# EAGLE board VarredorA (EAGLE 3.55)
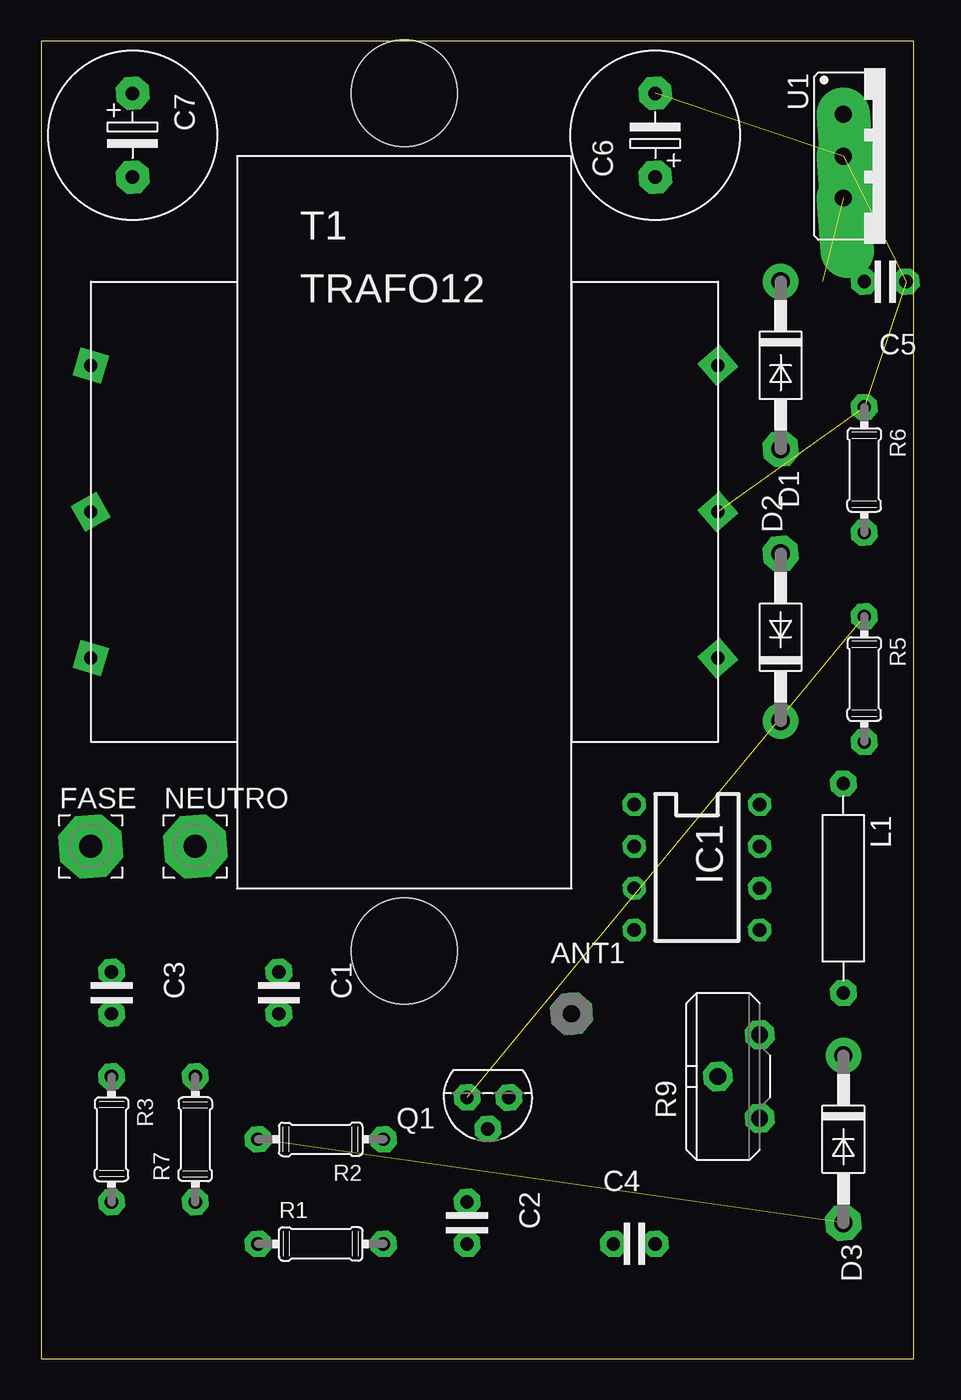
[diagram p0: board, top side]
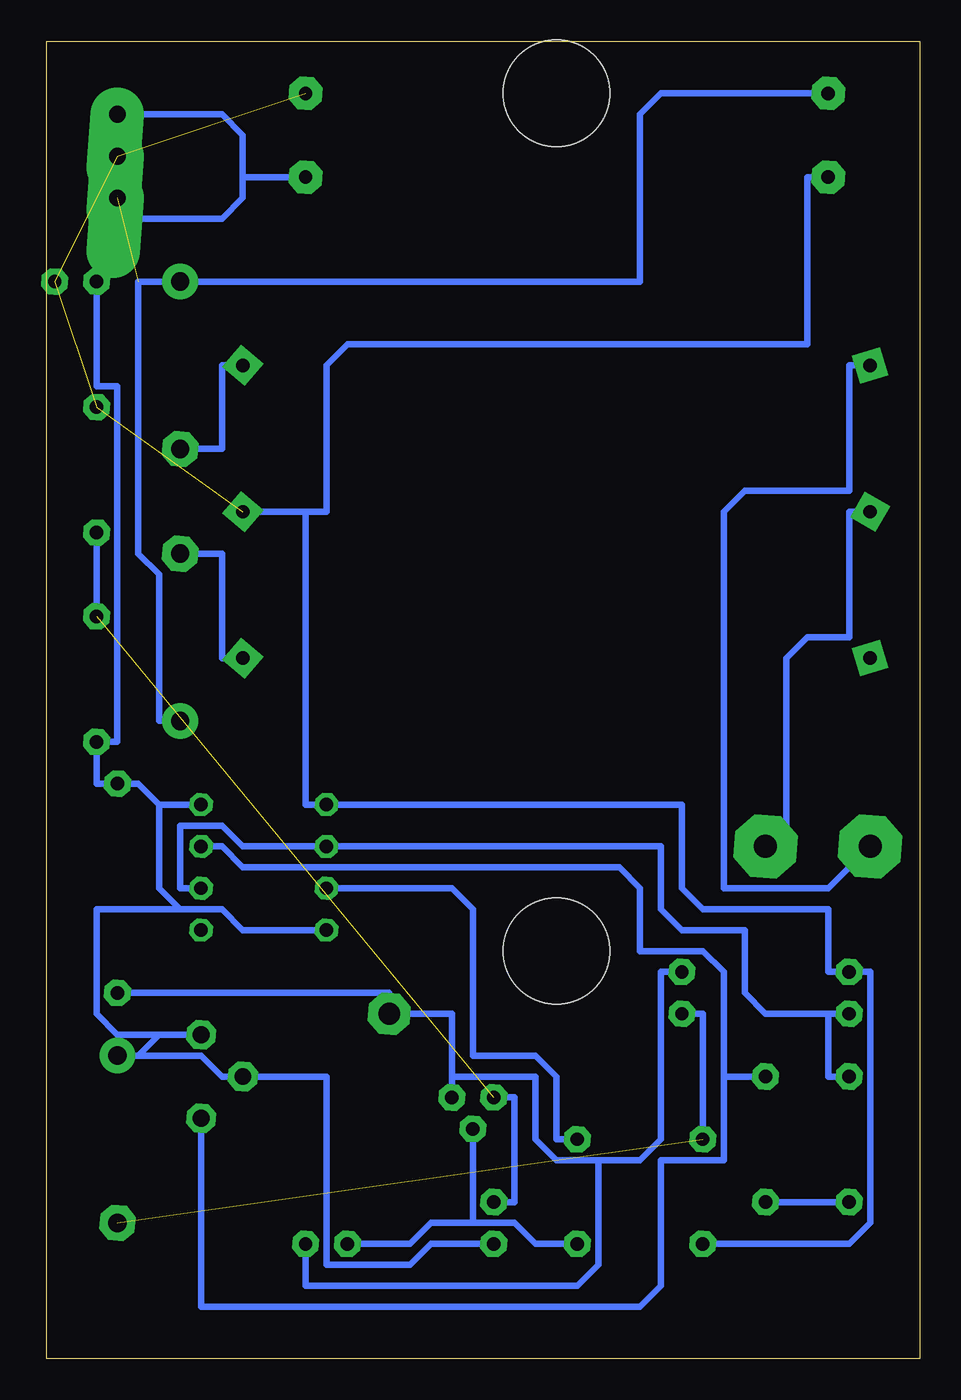
[diagram p1: board, bottom side, seen from below]

Size 53.01 x 80 mm. Coordinates in mm from the lower left corner, seen from the top.
Outline: 0,0 53.01,0 53.01,80 0,80 0,0
Copper layers used: Bottom

## Footprints (pad centres in the part's own frame; a part is rotated, then mirrored left to right if it is on the bottom)
D-01 = drill 1.321 pad 2.54 octagon:  0,0
2,5 = drill 0.813 pad 1.6 octagon:  -1.27,0;  1.27,0
-5 = drill 0.813 pad 2.007 octagon:  -2.54,0;  2.54,0
41-10 = drill 1.118 pad 2.159 octagon:  5.08,0 | drill 1.118 pad 2.159 round:  -5.08,0
81/1,4 = drill 1.397 pad 3.81 octagon:  0,0
L8 = drill 0.813 pad 1.397 octagon:  -3.81,-3.81;  -1.27,-3.81;  1.27,-3.81;  3.81,-3.81;  3.81,3.81;  1.27,3.81;  -1.27,3.81;  -3.81,3.81
12,5 = drill 0.813 pad 1.6 octagon:  -6.35,0;  6.35,0
92 = drill 0.813 pad 1.6 octagon:  1.27,0;  0,1.905;  -1.27,0
04/7 = drill 0.813 pad 1.6 octagon:  -3.81,0;  3.81,0
-10S = drill 1.016 pad 1.778 octagon:  -2.54,-1.27;  2.54,-1.27;  0,1.27
AFO500 = drill 0.813 pad 1.778 square: 10 -19.05,8.89; 20 -19.05,-8.89; C-1 19.05,8.89; C-2 19.05,-8.89; RA -19.05,0;  19.05,0 | hole 6.452: 0,25.4; 0,-26.67
220S = drill 1.016 pad 3.251 offset:  -2.54,-2.54;  0,-2.54;  2.54,-2.54

## Placement (x,y rotation side)
ANT1  ANTENA  [D-01]  32.22,20.95 0 top
C1  1nf  [2,5]  14.44,22.22 270 top
C2  4,7pf  [2,5]  25.87,8.25 270 top
C3  47nf  [2,5]  4.28,22.22 270 top
C4  4,7pf  [2,5]  36.03,6.98 0 top
C5  100nf  [2,5]  51.27,65.4 180 top
C6  100uf  [-5]  37.3,74.29 90 top
C7  1000uF  [-5]  5.55,74.29 270 top
D1  1N4004  [41-10]  44.92,60.32 270 top
D2  1N4004  [41-10]  44.92,43.81 90 top
D3  BB809  [41-10]  48.73,13.33 270 top
FASE  [81/1,4]  3.01,31.11 0 top
IC1  555  [L8]  39.84,29.84 270 top
L1  [12,5]  48.73,28.57 270 top
NEUTRO  [81/1,4]  9.36,31.11 0 top
Q1  BF494  [92]  27.14,15.87 180 top
R1  220  [04/7]  16.98,6.98 0 top
R2  220k  [04/7]  16.98,13.33 180 top
R3  4k7  [04/7]  4.28,13.33 270 top
R5  10K  [04/7]  50,41.27 270 top
R6  5,6K  [04/7]  50,53.97 270 top
R7  10k  [04/7]  9.36,13.33 90 top
R9  100k  [-10S]  42.38,17.14 90 top
T1  TRAFO12  [AFO500]  22.06,51.43 0 top
U1  7812T  [220S]  51.27,73.02 270 top

## Library data of the parts
ANT1 C1-C7 L1 R9 = discrete
D1-D3 = diode
FASE NEUTRO = wirepad
IC1 = demo
Q1 = npn
R1-R3 R5-R7 = r
T1 = Analogic
U1 = v-reg

## Nets
AC220: T1.20
GND: C3. C5. C6. C7. IC1. R1. R6. T1. U1.
N$1: D1. T1.C-1
N$2: D2. T1.C-2
N$3: C7. D1. D2. U1.
N$5: IC1. R7. R9.
N$6: C4. Q1. R1.
N$7: C2. Q1. R5. R6.
N$8: C1. D3. R2.
N$9: IC1. R2.
N$10: ANT1. C1. C4. L1. Q1.
N$12: R3. R7.
N$13: FASE. T1.10
N$14: C3. IC1. R3.
N$15: NEUTRO. T1.RA
V+: C2. C5. C6. D3. IC1. L1. R5. R9. U1.

## Tracks (layer width: path | path; a pad name or v marks a point on that pad's centre or on a via)
GND  (4 unrouted)
  Bottom 0.406: 37.3,51.43 37.3,33.65 36.03,33.65 14.44,33.65 14.44,28.57 13.17,27.3 5.55,27.3 5.55,23.49 4.28,23.49 3.01,23.49 3.01,8.25 4.28,6.98 13.17,6.98 | 37.3,51.43 T1. | C7. 6.82,71.75 6.82,61.59 34.76,61.59 36.03,60.32 36.03,51.43 37.3,51.43
N$1
  Bottom 0.406: T1.C-1 42.38,60.32 42.38,55.24 44.92,55.24
N$2
  Bottom 0.406: T1.C-2 42.38,42.54 42.38,48.89 44.92,48.89
N$3  (1 unrouted)
  Bottom 0.406: 5.55,76.83 15.71,76.83 16.98,75.56 16.98,65.4 D1. 47.46,65.4 47.46,48.89 46.19,47.62 46.19,38.73 D2.
N$5
  Bottom 0.406: 43.65,31.11 42.38,31.11 41.11,29.84 18.25,29.84 16.98,28.57 16.98,24.76 13.17,24.76 11.9,23.49 11.9,17.14 | 11.9,17.14 R7. | 43.65,14.6 43.65,3.17 16.98,3.17 15.71,4.44 15.71,12.06 11.9,12.06 11.9,17.14
N$6
  Bottom 0.406: R1. 23.33,6.98 24.6,8.25 27.14,8.25 | 27.14,8.25 29.68,8.25 30.95,6.98 34.76,6.98 | 27.14,8.25 27.14,13.97
N$7  (1 unrouted)
  Bottom 0.406: 50,45.08 R6. | 25.87,9.52 24.6,9.52 24.6,15.87 25.87,15.87
N$8  (1 unrouted)
  Bottom 0.406: R2. 13.17,20.95 C1.
N$9
  Bottom 0.406: 36.03,28.57 28.41,28.57 27.14,27.3 27.14,18.41 23.33,18.41 22.06,17.14 22.06,13.33 20.79,13.33
N$10
  Bottom 0.406: 28.41,17.14 28.41,20.95 ANT1. 32.22,22.22 L1. | 28.41,17.14 Q1. | C4. 37.3,4.44 20.79,4.44 19.52,5.71 19.52,12.06 | 19.52,12.06 22.06,12.06 23.33,13.33 23.33,17.14 28.41,17.14 | 14.44,23.49 15.71,23.49 15.71,13.33 16.98,12.06 19.52,12.06
N$12
  Bottom 0.406: R3. 9.36,9.52
N$13
  Bottom 0.406: T1.10 4.28,60.32 4.28,52.7 10.63,52.7 11.9,51.43 11.9,28.57 5.55,28.57 FASE.
N$14
  Bottom 0.406: 4.28,17.14 5.55,17.14 5.55,20.95 | 5.55,20.95 C3. | 43.65,28.57 44.92,28.57 44.92,32.38 42.38,32.38 41.11,31.11 36.03,31.11 15.71,31.11 15.71,27.3 14.44,26.03 10.63,26.03 10.63,22.22 9.36,20.95 5.55,20.95
N$15
  Bottom 0.406: T1.RA 4.28,51.43 4.28,43.81 6.82,43.81 8.09,42.54 8.09,32.38 NEUTRO.
V+
  Bottom 0.406: 46.19,19.68 43.65,19.68 | 47.46,18.41 46.19,19.68 | 47.46,18.41 D3. | C2. 29.68,6.98 30.95,5.71 36.03,5.71 36.03,17.14 R9. 42.38,17.14 43.65,18.41 47.46,18.41 | 41.11,71.75 41.11,70.48 42.38,69.21 50,69.21 C5. 50,59.05 48.73,59.05 48.73,37.46 R5. 50,34.92 48.73,34.92 47.46,34.92 46.19,33.65 | 41.11,71.75 37.3,71.75 | 41.11,71.75 41.11,74.29 42.38,75.56 48.73,75.56 | 36.03,26.03 41.11,26.03 42.38,27.3 44.92,27.3 | 44.92,27.3 46.19,28.57 46.19,33.65 | 46.19,33.65 IC1. | 46.19,19.68 48.73,19.68 50,20.95 50,27.3 44.92,27.3